# EAGLE board GA144_SRAM_ISI (EAGLE 5.11)

Size 100 x 80 mm. Coordinates in mm from the lower left corner, seen from the top.
Outline: 0,0 100,0 100,80 0,80 0,0
Copper layers (1*16): Top 0.0356mm / dielectric 1.5011mm / Bottom 0.0356mm
Design rules "SilverCircuits": minimum track width 7mil, minimum drill 14mil, track to track 7mil, track to pad 7mil, pad to pad 7mil, via to via 7mil, smd to smd 0mil, copper to edge 20mil, drill to drill 8mil, minimum pad ring 10mil, minimum via ring 8mil, stop-mask expansion 4mil, vias tented up to drill 0mil, thermal gap 10mil
tRestrict: area 27.9,52 to 37,61

## Footprints (pad centres in the part's own frame; a part is rotated, then mirrored left to right if it is on the bottom)
1210 = smd 1.2 x 2: 1 -1.6,0; 2 1.6,0
0402-CAP = smd 0.7 x 0.9: 1 -0.65,0; 2 0.65,0
VISHAY_C = smd 3.556 x 1.778: + 0,3.048; - 0,-3.048
JP1 = drill 0.914 long: 1 0,-1.27; 2 0,1.27
1X01_LONGPAD = drill 1.118 pad 1.88 long: 1 0,0
1206 = smd 1.6 x 1.8: 1 -1.4,0; 2 1.4,0
L02P = drill 1.016 long: 1 1.25,-6.25; 2 -1.25,-6.25
QFN88-0.4MM = smd 0.6 x 0.2: $1 -5.21,4.3; $2 -5.21,3.9; $3 -5.21,3.5; $4 -5.21,3.1; $5 -5.21,2.7; $6 -5.21,2.3; $7 -5.21,1.9; $8 -5.21,1.5; $9 -5.21,1.1; $10 -5.21,0.7; $11 -5.21,0.3; $12 -5.21,-0.1; $13 -5.21,-0.5; $14 -5.21,-0.9; $15 -5.21,-1.3; $16 -5.21,-1.7; $17 -5.21,-2.1; $18 -5.21,-2.5; $19 -5.21,-2.9; $20 -5.21,-3.3; $21 -5.21,-3.7; $22 -5.21,-4.1; $45 4.61,-4.1; $46 4.61,-3.7; $47 4.61,-3.3; $48 4.61,-2.9; $49 4.61,-2.5; $50 4.61,-2.1; $51 4.61,-1.7; $52 4.61,-1.3; $53 4.61,-0.9; $54 4.61,-0.5; $55 4.61,-0.1; $56 4.61,0.3; $57 4.61,0.7; $58 4.61,1.1; $59 4.61,1.5; $60 4.61,1.9; $61 4.61,2.3; $62 4.61,2.7; $63 4.61,3.1; $64 4.61,3.5; $65 4.61,3.9; $66 4.61,4.3 | smd 0.2 x 0.6: $23 -4.5,-4.81; $24 -4.1,-4.81; $25 -3.7,-4.81; $26 -3.3,-4.81; $27 -2.9,-4.81; $28 -2.5,-4.81; $29 -2.1,-4.81; $30 -1.7,-4.81; $31 -1.3,-4.81; $32 -0.9,-4.81; $33 -0.5,-4.81; $34 -0.1,-4.81; $35 0.3,-4.81; $36 0.7,-4.81; $37 1.1,-4.81; $38 1.5,-4.81; $39 1.9,-4.81; $40 2.3,-4.81; $41 2.7,-4.81; $42 3.1,-4.81; $43 3.5,-4.81; $44 3.9,-4.81; $67 3.9,4.99; $68 3.5,4.99; $69 3.1,4.99; $70 2.7,4.99; $71 2.3,4.99; $72 1.9,4.99; $73 1.5,4.99; $74 1.1,4.99; $75 0.7,4.99; $76 0.3,4.99; $77 -0.1,4.99; $78 -0.5,4.99; $79 -0.9,4.99; $80 -1.3,4.99; $81 -1.7,4.99; $82 -2.1,4.99; $83 -2.5,4.99; $84 -2.9,4.99; $85 -3.3,4.99; $86 -3.7,4.99; $87 -4.1,4.99; $88 -4.5,4.99 | smd 1.27 x 0.635: $89 -0.2,0 | hole 0.6: -0.3,0.1
TSOP-48 = smd 0.9 x 0.3: 1 -3.4,8.29; 2 -3.4,7.79; 3 -3.4,7.29; 4 -3.4,6.79; 5 -3.4,6.29; 6 -3.4,5.79; 7 -3.4,5.29; 8 -3.4,4.79; 9 -3.4,4.29; 10 -3.4,3.79; 11 -3.4,3.29; 12 -3.4,2.79; 13 -3.4,2.29; 14 -3.4,1.79; 15 -3.4,1.29; 16 -3.4,0.79; 17 -3.4,0.29; 18 -3.4,-0.21; 19 -3.4,-0.71; 20 -3.4,-1.21; 21 -3.4,-1.71; 22 -3.4,-2.21; 23 -3.4,-2.71; 24 -3.4,-3.21; 25 16.1,-3.21; 26 16.1,-2.71; 27 16.1,-2.21; 28 16.1,-1.71; 29 16.1,-1.21; 30 16.1,-0.71; 31 16.1,-0.21; 32 16.1,0.29; 33 16.1,0.79; 34 16.1,1.29; 35 16.1,1.79; 36 16.1,2.29; 37 16.1,2.79; 38 16.1,3.29; 39 16.1,3.79; 40 16.1,4.29; 41 16.1,4.79; 42 16.1,5.29; 43 16.1,5.79; 44 16.1,6.29; 45 16.1,6.79; 46 16.1,7.29; 47 16.1,7.79; 48 16.1,8.29
SO08 = smd 0.61 x 2.21: 1 -1.905,-2.616; 2 -0.635,-2.616; 3 0.635,-2.616; 4 1.905,-2.616; 5 1.905,2.616; 6 0.635,2.616; 7 -0.635,2.616; 8 -1.905,2.616
TO263-3 = smd 1 x 3.4: 1 -3.81,-6.6; 2 -1.27,-6.6; 3 1.27,-6.6 | smd 6.8 x 9.6: 4 -1.27,3.5

## Placement (x,y rotation side)
C1  100nF  [1210]  25.83,8.76 90 top
C2  100nF  [0402-CAP]  31.98,60.26 180 bottom
C3  100nF  [0402-CAP]  37.84,38.22 90 bottom
C4  100nF  [0402-CAP]  31.8,52.71 180 bottom
C5  100nF  [0402-CAP]  29.67,38.44 270 bottom
C6  4.7uF  [VISHAY_C]  60.65,12.43 180 top
C7  100nF  [1210]  61.51,26.36 90 top
C8  4.7uF  [VISHAY_C]  68.5,74.86 270 top
C9  4.7uF  [VISHAY_C]  38.03,8.47 180 top
C10  100nF  [1210]  32.17,8.79 90 top
JP1  [JP1]  59.66,2.85 90 top
JP2  M01PTH_LONGPAD  [1X01_LONGPAD]  3.57,35.67 90 top
JP3  M01PTH_LONGPAD  [1X01_LONGPAD]  3.46,40.03 90 top
JP4  M01PTH_LONGPAD  [1X01_LONGPAD]  14.07,76.83 180 top
JP5  M01PTH_LONGPAD  [1X01_LONGPAD]  9.93,76.86 180 top
JP6  M01PTH_LONGPAD  [1X01_LONGPAD]  72.14,68.82 90 top
JP7  M01PTH_LONGPAD  [1X01_LONGPAD]  3.6,28.66 270 top
JP8  M01PTH_LONGPAD  [1X01_LONGPAD]  29.6,76.9 180 top
JP9  M01PTH_LONGPAD  [1X01_LONGPAD]  25.69,76.89 180 top
JP10  M01PTH_LONGPAD  [1X01_LONGPAD]  33.45,76.92 0 top
JP11  M01PTH_LONGPAD  [1X01_LONGPAD]  37.43,77 180 top
JP12  M01PTH_LONGPAD  [1X01_LONGPAD]  53.64,77.06 0 top
JP13  M01PTH_LONGPAD  [1X01_LONGPAD]  49.69,77.03 0 top
JP14  M01PTH_LONGPAD  [1X01_LONGPAD]  72.91,35.78 90 top
JP15  M01PTH_LONGPAD  [1X01_LONGPAD]  73.23,43.28 90 top
JP16  M01PTH_LONGPAD  [1X01_LONGPAD]  73.22,26.64 90 top
JP17  M01PTH_LONGPAD  [1X01_LONGPAD]  73,30.77 90 top
JP18  M01PTH_LONGPAD  [1X01_LONGPAD]  3.8,58.05 90 top
JP19  M01PTH_LONGPAD  [1X01_LONGPAD]  3.75,54 270 top
JP20  M01PTH_LONGPAD  [1X01_LONGPAD]  22.2,76.85 0 top
JP21  M01PTH_LONGPAD  [1X01_LONGPAD]  18.05,76.8 0 top
JP22  M01PTH_LONGPAD  [1X01_LONGPAD]  3.55,44.55 270 top
JP23  M01PTH_LONGPAD  [1X01_LONGPAD]  3.6,48.4 90 top
JP24  M01PTH_LONGPAD  [1X01_LONGPAD]  3.7,62.2 90 top
JP25  M01PTH_LONGPAD  [1X01_LONGPAD]  3.9,65.8 90 top
JP26  M01PTH_LONGPAD  [1X01_LONGPAD]  73.1,53.65 90 top
JP27  M01PTH_LONGPAD  [1X01_LONGPAD]  73.05,57.8 90 top
JP28  M01PTH_LONGPAD  [1X01_LONGPAD]  41.05,77 0 top
JP29  M01PTH_LONGPAD  [1X01_LONGPAD]  73,61.5 270 top
JP30  M01PTH_LONGPAD  [1X01_LONGPAD]  73.1,50.05 90 top
R1  5.1K  [1206]  32.45,21.07 0 top
R2  5.1K  [1206]  25.21,20.98 0 top
R3  1K  [1206]  13.01,42.97 180 top
R4  1K  [1206]  13.12,47.12 0 top
R5  5.1K  [1206]  64.32,68.48 0 top
SV1  [L02P]  49.34,-3.53 180 top
U$1  GA144  [QFN88-0.4MM]  32.83,56.42 0 top
U$2  IS61WV102416ALL  [TSOP-48]  27.2,31.3 0 top
U$9  SPI_FLASH-X25XXSMD  [SO08]  62.88,61.56 180 top
U$12  MIC39300  [TO263-3]  51.23,15.98 0 top

## Library data of the parts
C1-C10 U$9 = SparkFun
JP1 = jumper
JP2-JP30 U$1 U$2 = ga144
R1-R5 = QFN
SV1 = con-amp-mt; OC_FARNELL: unknown; OC_NEWARK: unknown
U$12 = v-reg-micrel

## Nets
1.8V: C3.1 C5.1 C7.1 JP1.2 R1.1 R2.2 R5.1 U$1.$5 U$1.$17 U$1.$29 U$1.$41 U$1.$49 U$1.$62 U$1.$75 U$1.$83 U$2.12 U$2.36 U$9.3 U$9.8
ADRESSE0: U$1.$68 U$2.5
ADRESSE1: U$1.$67 U$2.4
ADRESSE2: U$1.$66 U$2.3
ADRESSE3: U$1.$65 U$2.2
ADRESSE4: U$1.$58 U$2.1
ADRESSE5: U$1.$57 U$2.48
ADRESSE6: U$1.$56 U$2.47
ADRESSE7: U$1.$55 U$2.46
ADRESSE8: U$1.$54 U$2.45
ADRESSE9: U$1.$53 U$2.30
ADRESSE10: U$1.$46 U$2.29
ADRESSE11: U$1.$45 U$2.28
ADRESSE12: U$1.$44 U$2.27
ADRESSE13: U$1.$43 U$2.26
ADRESSE14: U$1.$42 U$2.25
ADRESSE15: U$1.$39 U$2.24
ADRESSE16: U$1.$38 U$2.23
ADRESSE17: U$1.$37 U$2.22
DATA0: U$1.$1 U$2.8
DATA1: U$1.$2 U$2.9
DATA2: U$1.$3 U$2.10
DATA3: U$1.$8 U$2.11
DATA4: U$1.$9 U$2.14
DATA5: U$1.$10 U$2.15
DATA6: U$1.$11 U$2.16
DATA7: U$1.$12 U$2.17
DATA8: U$1.$13 U$2.32
DATA9: U$1.$16 U$2.33
DATA10: U$1.$21 U$2.34
DATA11: U$1.$22 U$2.35
DATA12: U$1.$23 U$2.38
DATA13: U$1.$24 U$2.39
DATA14: U$1.$25 U$2.40
DATA15: U$1.$30 U$2.41
GND: C1.2 C2.2 C3.2 C4.2 C5.2 C6.- C7.2 C8.- C9.- C10.2 JP7.1 R3.2 R4.1 SV1.2 U$1.$89 U$2.13 U$2.37 U$2.42 U$2.43 U$2.44 U$9.4 U$12.2 U$12.4
N$1: C2.1 C4.1 U$1.$4 U$1.$19 U$1.$28 U$1.$40 U$1.$47 U$1.$64 U$1.$74 U$1.$82
N$2: U$1.$34 U$2.21
N$3: U$1.$33 U$2.20
N$4: R1.2 U$1.$35 U$2.18
N$5: R2.1 U$1.$36 U$2.7
N$6: R3.1 U$1.$32
N$7: R4.2 U$1.$31
N$8: C8.+ JP6.1 R5.2 U$1.$88 U$9.7
N$9: U$1.$81 U$9.1
N$10: U$1.$85 U$9.2
N$11: U$1.$84 U$9.5
N$12: U$1.$80 U$9.6
N$13: JP3.1 U$1.$26
N$14: C9.+ C10.1 SV1.1 U$12.1
N$15: C1.1 C6.+ JP1.1 U$12.3
N$16: JP8.1 U$1.$76
N$17: JP9.1 U$1.$77
N$18: JP10.1 U$1.$73
N$19: JP11.1 U$1.$72
N$20: JP12.1 U$1.$69
N$21: JP13.1 U$1.$70
N$22: JP14.1 U$1.$61
N$23: JP15.1 U$1.$63
N$24: JP16.1 U$1.$48
N$25: JP17.1 U$1.$50
N$26: JP2.1 U$1.$27
N$27: JP4.1 U$1.$86
N$28: JP18.1 U$1.$14
N$29: JP5.1 U$1.$87
N$30: JP19.1 U$1.$15
N$31: JP20.1 U$1.$78
N$32: JP21.1 U$1.$79
N$33: JP22.1 U$1.$20
N$34: JP23.1 U$1.$18
N$35: JP24.1 U$1.$7
N$36: JP25.1 U$1.$6
N$37: JP26.1 U$1.$52
N$38: JP27.1 U$1.$59
N$39: JP28.1 U$1.$71
N$40: JP29.1 U$1.$60
N$41: JP30.1 U$1.$51

## Tracks (layer width: path | path; a pad name or v marks a point on that pad's centre or on a via)
1.8V  (18 unrouted)
ADRESSE0  (1 unrouted)
ADRESSE1  (1 unrouted)
ADRESSE2  (1 unrouted)
ADRESSE3  (1 unrouted)
ADRESSE4  (1 unrouted)
ADRESSE5  (1 unrouted)
ADRESSE6  (1 unrouted)
ADRESSE7  (1 unrouted)
ADRESSE8  (1 unrouted)
ADRESSE9  (1 unrouted)
ADRESSE10  (1 unrouted)
ADRESSE11  (1 unrouted)
ADRESSE12  (1 unrouted)
ADRESSE13  (1 unrouted)
ADRESSE14  (1 unrouted)
ADRESSE15  (1 unrouted)
ADRESSE16  (1 unrouted)
ADRESSE17  (1 unrouted)
DATA0  (1 unrouted)
DATA1  (1 unrouted)
DATA2  (1 unrouted)
DATA3  (1 unrouted)
DATA4  (1 unrouted)
DATA5  (1 unrouted)
DATA6  (1 unrouted)
DATA7  (1 unrouted)
DATA8  (1 unrouted)
DATA9  (1 unrouted)
DATA10  (1 unrouted)
DATA11  (1 unrouted)
DATA12  (1 unrouted)
DATA13  (1 unrouted)
DATA14  (1 unrouted)
DATA15  (1 unrouted)
GND  (22 unrouted)
N$1  (9 unrouted)
N$2  (1 unrouted)
N$3  (1 unrouted)
N$4  (2 unrouted)
N$5  (2 unrouted)
N$6  (1 unrouted)
N$7  (1 unrouted)
N$8  (4 unrouted)
N$9  (1 unrouted)
N$10  (1 unrouted)
N$11  (1 unrouted)
N$12  (1 unrouted)
N$13  (1 unrouted)
N$14  (3 unrouted)
N$15  (3 unrouted)
N$16  (1 unrouted)
N$17  (1 unrouted)
N$18  (1 unrouted)
N$19  (1 unrouted)
N$20  (1 unrouted)
N$21  (1 unrouted)
N$22  (1 unrouted)
N$23  (1 unrouted)
N$24  (1 unrouted)
N$25  (1 unrouted)
N$26  (1 unrouted)
N$27  (1 unrouted)
N$28  (1 unrouted)
N$29  (1 unrouted)
N$30  (1 unrouted)
N$31  (1 unrouted)
N$32  (1 unrouted)
N$33  (1 unrouted)
N$34  (1 unrouted)
N$35  (1 unrouted)
N$36  (1 unrouted)
N$37  (1 unrouted)
N$38  (1 unrouted)
N$39  (1 unrouted)
N$40  (1 unrouted)
N$41  (1 unrouted)